# EAGLE board v1_bluetooth-20x20 (EAGLE 9.0.0)
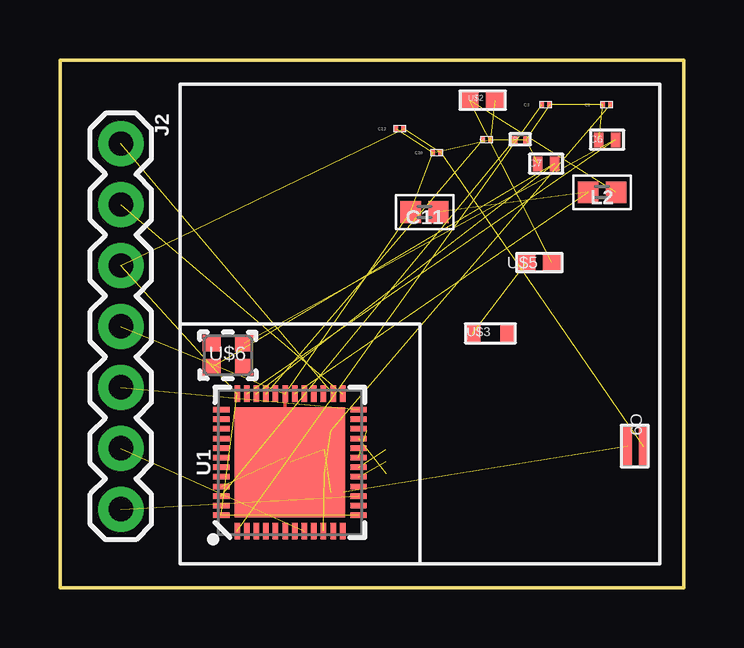
[diagram p0: board, top side]
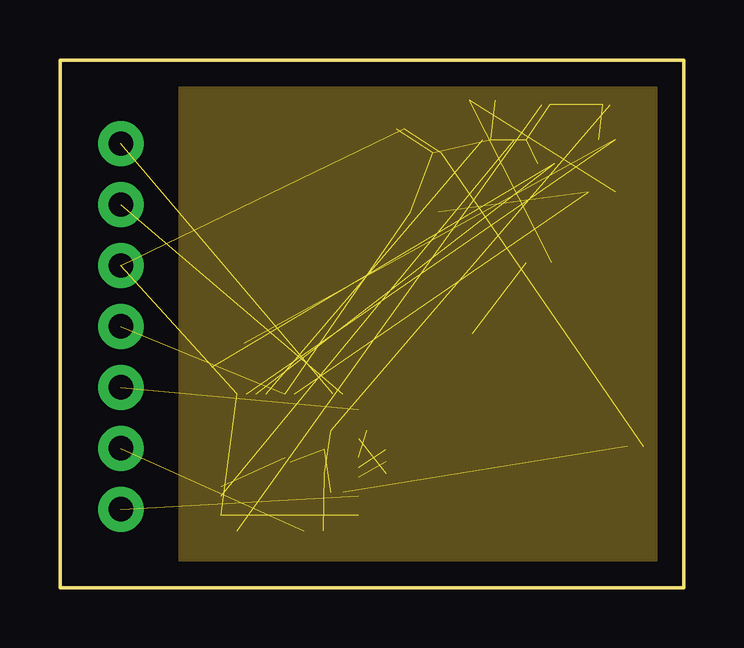
[diagram p1: board, inner layer Route8]
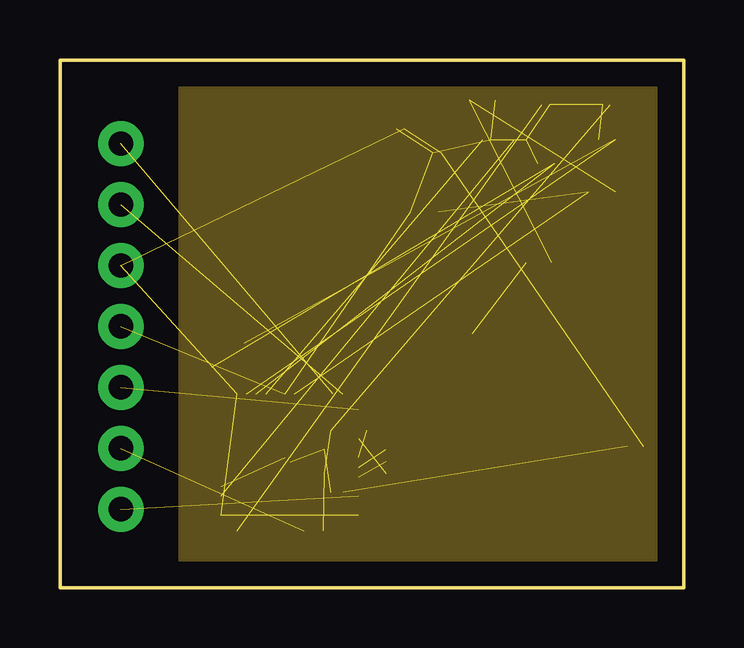
[diagram p2: board, inner layer Route10]
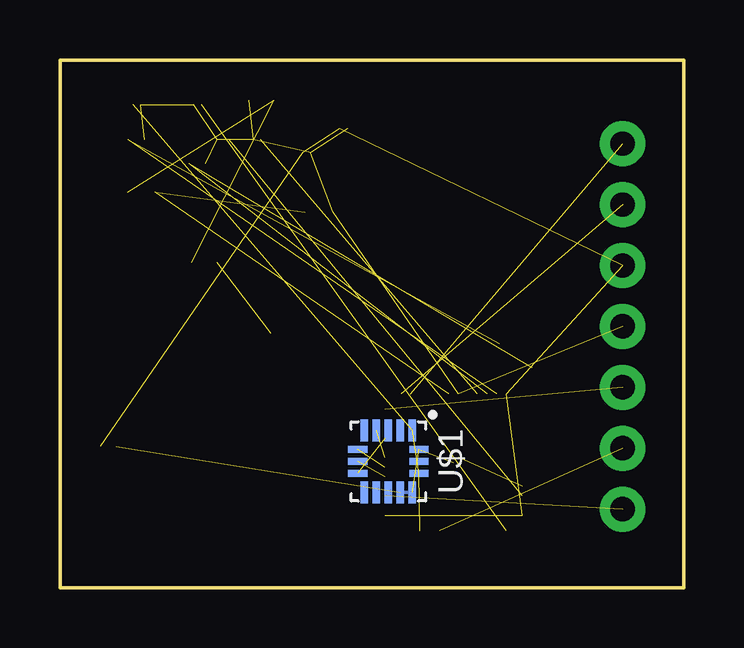
[diagram p3: board, bottom side, seen from below]

Size 26 x 22 mm. Coordinates in mm from the lower left corner, seen from the top.
Outline: 0,0 0,22 26,22 26,0 0,0
Copper layers (1*8*10*16): Top 0.035mm / dielectric 0.175mm / Route8 0.017mm / dielectric 0.145mm / Route10 0.017mm / dielectric 0.175mm / Bottom 0.035mm
Design rules "default *": minimum track width 6mil, minimum drill 8mil, track to track 6mil, track to pad 6mil, pad to pad 6mil, via to via 6mil, smd to smd 6mil, copper to edge 40mil, drill to drill 6mil, minimum pad ring 10mil, minimum via ring 8mil, stop-mask expansion 4mil, vias tented up to drill 0mil, thermal gap 10mil

## Footprints (pad centres in the part's own frame; a part is rotated, then mirrored left to right if it is on the bottom)
CAP_0402-L = smd 0.178 x 0.254: 1 -0.152,0; 2 0.178,0
CAPC1005X55N = smd 0.4 x 0.6: 1 -0.4,0; 2 0.3,0
CAPC0502X28N = smd 0.25 x 0.3: 1 -0.3,0; 2 0.2,0
4P7UFCAPACITOR = smd 0.35 x 1.6: 1 -0.4,0.1; 2 0.25,0.1
0402 = smd 0.85 x 0.9: 1 -0.58,0; 2 0.58,0
1X07 = drill 1.016 pad 1.88: 1 0,0; 2 2.54,0; 3 5.08,0; 4 7.62,0; 5 10.16,0; 6 12.7,0; 7 15.24,0
QFN48-6X6MM = smd 0.68 x 0.23: 1 -2.86,2.2; 2 -2.86,1.8; 3 -2.86,1.4; 4 -2.86,1; 5 -2.86,0.6; 6 -2.86,0.2; 7 -2.86,-0.2; 8 -2.86,-0.6; 9 -2.86,-1; 10 -2.86,-1.4; 11 -2.86,-1.8; 12 -2.86,-2.2; 25 2.86,-2.2; 26 2.86,-1.8; 27 2.86,-1.4; 28 2.86,-1; 29 2.86,-0.6; 30 2.86,-0.2; 31 2.86,0.2; 32 2.86,0.6; 33 2.86,1; 34 2.86,1.4; 35 2.86,1.8; 36 2.86,2.2 | smd 0.23 x 0.68: 13 -2.2,-2.86; 14 -1.8,-2.86; 15 -1.4,-2.86; 16 -1,-2.86; 17 -0.6,-2.86; 18 -0.2,-2.86; 19 0.2,-2.86; 20 0.6,-2.86; 21 1,-2.86; 22 1.4,-2.86; 23 1.8,-2.86; 24 2.2,-2.86; 37 2.2,2.86; 38 1.8,2.86; 39 1.4,2.86; 40 1,2.86; 41 0.6,2.86; 42 0.2,2.86; 43 -0.2,2.86; 44 -0.6,2.86; 45 -1,2.86; 46 -1.4,2.86; 47 -1.8,2.86; 48 -2.2,2.86 | smd 4.6 x 4.6: EP 0,0
TFLGA-16/3.3MMX3.1MM = smd 0.3 x 0.8: CS 0.5,-1.275; GND@3 -0.5,1.275; MISO 0,-1.275; MOSI -0.5,-1.275; NC@2 0,1.275; VS 0.5,1.275 | smd 0.925 x 0.3: GND@1 1.288,0.5; GND@2 1.288,1; INT1 1.288,0; INT2 1.288,-1; NC@1 -1.288,0.5; RESERVED@1 -1.288,0; RESERVED@2 -1.288,-1; RESERVED@3 1.288,-0.5; SCLK -1.288,-0.5; VDD/IO -1.288,1
0402' = smd 0.75 x 0.75: 1 -1.62,0; 2 -0.57,0
2450AT14A0100 = smd 0.65 x 0.8: FEED 0.3,0.4; NC 1.8,0.4
0402-1005 = smd 0.75 x 0.75: 1 -0.35,0; 2 0.7,0
32MHZCRYSTAL = smd 0.75 x 0.7: 1 0.485,0.47; 2 1.835,0.47; 3 1.835,1.47; 4 0.485,1.47

## Placement (x,y rotation side)
C1  C0402X5R0G104M020BCCAP_0402-L  [CAP_0402-L]  22.78,20.13 0 top
C3  C0402X5R0G104M020BCCAP_0402-L  [CAP_0402-L]  20.24,20.13 0 top
C4  C0402C0G1C101J020BCCAP_0402-L  [CAP_0402-L]  17.78,18.67 0 top
C6  GRM1555C1H6R0CA01D  [CAPC1005X55N]  22.86,18.67 0 top
C7  GRM1555C1H6R0CA01D  [CAPC1005X55N]  20.32,17.67 0 top
C8  GRMMDXR60J105ME05D  [CAPC0502X28N]  19.24,18.67 0 top
C9  4P7UFCAPACITOR4P7UFCAPACITOR  [4P7UFCAPACITOR]  24.06,5.8 0 top
C10  C0402X5R0G104M020BCCAP_0402-L  [CAP_0402-L]  15.7,18.13 0 top
C11  0.8pF  [0402]  15.2,15.66 0 top
C12  C0402X5R0G104M020BCCAP_0402-L  [CAP_0402-L]  14.16,19.13 0 top
J2  header  [1X07]  2.54,18.51 270 top
L2  3.9nH  [0402]  22.6,16.49 0 top
U1  NRF52832  [QFN48-6X6MM]  9.59,5.22 90 top
U$1  ADXL362  [TFLGA-16/3.3MMX3.1MM]  12.31,5.26 270 bottom
U$2  TUNINGINDUCTOR  [0402']  18.7,20.32 0 top
U$3  2450AT14A0100  [2450AT14A0100]  16.9,10.2 0 top
U$5  0402-1005  [0402-1005]  19.8,13.55 0 top
U$6  32MHZCRYSTAL  [32MHZCRYSTAL]  5.84,8.71 0 top

## Library data of the parts
C1 C3 C10 C12 = 0p1_uF_capacitor; MANUFACTURER_PART_NUMBER: C0402C0G1C101J020BC; VENDOR: TDK
C4 = 100_pF_capacitor; MANUFACTURER_PART_NUMBER: C0402C0G1C101J020BC; VENDOR: TDK
C6 C7 = 6pf_capacitor_new-bigger; DESCRIPTION: 0402 6 pF 50 V ±0.25 pF Tolerance C0G SMT Multilayer Ceramic Capacitor; DIGI-KEY_PART_NUMBER: 490-8222-1-ND; DIGI-KEY_PURCHASE_URL: https://www.digikey.com/product-detail/en/murata-electronics-north-america/GRM1555C1H6R0CA01D/490-8222-1-ND/4380516?WT.z_cid=ref_snapeda&utm_source=snapeda&utm_medium=aggregator&utm_campaign=buynow; MF: Murata; MP: GRM1555C1H6R0CA01D; PACKAGE: 0402 Murata
C8 = 1UFCAPACITOR; DESCRIPTION: Cap, Mlcc, X5r, 1uf, 6.3v, 015008; DIGI-KEY_PART_NUMBER: 490-13424-1-ND; DIGI-KEY_PURCHASE_URL: https://www.digikey.com/product-detail/en/murata-electronics-north-america/GRMMDXR60J105ME05D/490-13424-1-ND/6023636?WT.z_cid=ref_snapeda&utm_source=snapeda&utm_medium=aggregator&utm_campaign=buynow; MF: Murata; MP: GRMMDXR60J105ME05D; PACKAGE: 015008 Murata
C9 = 4p7_uF_capacitor; MANUFACTURER_PART_NUMBER: C0816X5R0J475M050AC; VENDOR: TDK
C11 = nrf52832-breakout-temp; PROD_ID: CAP-13456
J2 = SparkFun-Connectors
L2 = nrf52832-breakout-temp; PROD_ID: NDUC-13457
U1 = nrf52832-breakout-temp; PROD_ID: IC-13460
U$1 = ADXL362
U$2 = tuninginductor
U$3 = antennanew
U$5 = 0402-1005
U$6 = 32_mhz_crystal

## Nets
ADXL_POWER-QFAA: C1.2 U1.10 U$1.VDD/IO U$1.VS
ANT-QFAA: C11.2 L2.1 U1.30
CS-QFAA: U1.21 U$1.CS
DEC1-QFAA: C3.1 U1.1
DEC3-QFAA: C4.1 U1.33
DEC4-QFAA: C8.1 U1.46
GND: C1.1 C3.2 C4.2 C6.1 C7.1 C8.2 C9.1 C10.1 C11.1 C12.1 J2.4 U1.31 U1.45 U1.EP U$1.GND@1 U$1.GND@2 U$1.GND@3 U$2.2
MISO-QFAA: U1.17 U$1.MISO
MOSI-QFAA: U1.18 U$1.MOSI
N$1: L2.2 U$2.1 U$5.2
N$2: U$3.FEED U$5.1
P0.06-QFAA: J2.6 U1.8
P0.12-QFAA: J2.7 U1.15
RESET-QFAA: J2.5 U1.24
SCLK-QFAA: U1.19 U$1.SCLK
SWDCLK-QFAA: J2.2 U1.25
SWDIO-QFAA: J2.1 U1.26
VDD: C9.2 C10.2 C12.2 J2.3 U1.13 U1.36 U1.48
XC1-QFAA: C7.2 U1.34 U$6.1
XC2-QFAA: C6.2 U1.35 U$6.3

## Tracks (layer width: path | path; a pad name or v marks a point on that pad's centre or on a via)
ADXL_POWER-QFAA  (3 unrouted)
ANT-QFAA  (2 unrouted)
CS-QFAA  (1 unrouted)
DEC1-QFAA  (1 unrouted)
DEC3-QFAA  (1 unrouted)
DEC4-QFAA  (1 unrouted)
GND  (15 unrouted)
  Top 0.152: U1.31 9.39,5.42 U1.EP
  Bottom 0.152: U$1.GND@1 U$1.GND@2
  pour Route10: 5,1 5,21 25,21 25,1
MISO-QFAA  (1 unrouted)
MOSI-QFAA  (1 unrouted)
N$1  (2 unrouted)
N$2  (1 unrouted)
P0.06-QFAA  (1 unrouted)
P0.12-QFAA  (1 unrouted)
RESET-QFAA  (1 unrouted)
SCLK-QFAA  (1 unrouted)
SWDCLK-QFAA  (1 unrouted)
SWDIO-QFAA  (1 unrouted)
VDD  (6 unrouted)
  pour Route8: 5,1 5,21 25,21 25,1
XC1-QFAA  (2 unrouted)
XC2-QFAA  (2 unrouted)